# Altium PCB sdram_xsd.PcbDoc
Units mm, origin at the board's own origin, x right, y up, seen from the top; angles counter-clockwise.
Board outline 23.2 x 49.92 mm, 4 copper layers (Top Layer, Signal Layer 2, Signal Layer 1, Bottom Layer), stack 1.651 mm thick; 16 components, 39 nets, 177 pads, 109 vias.
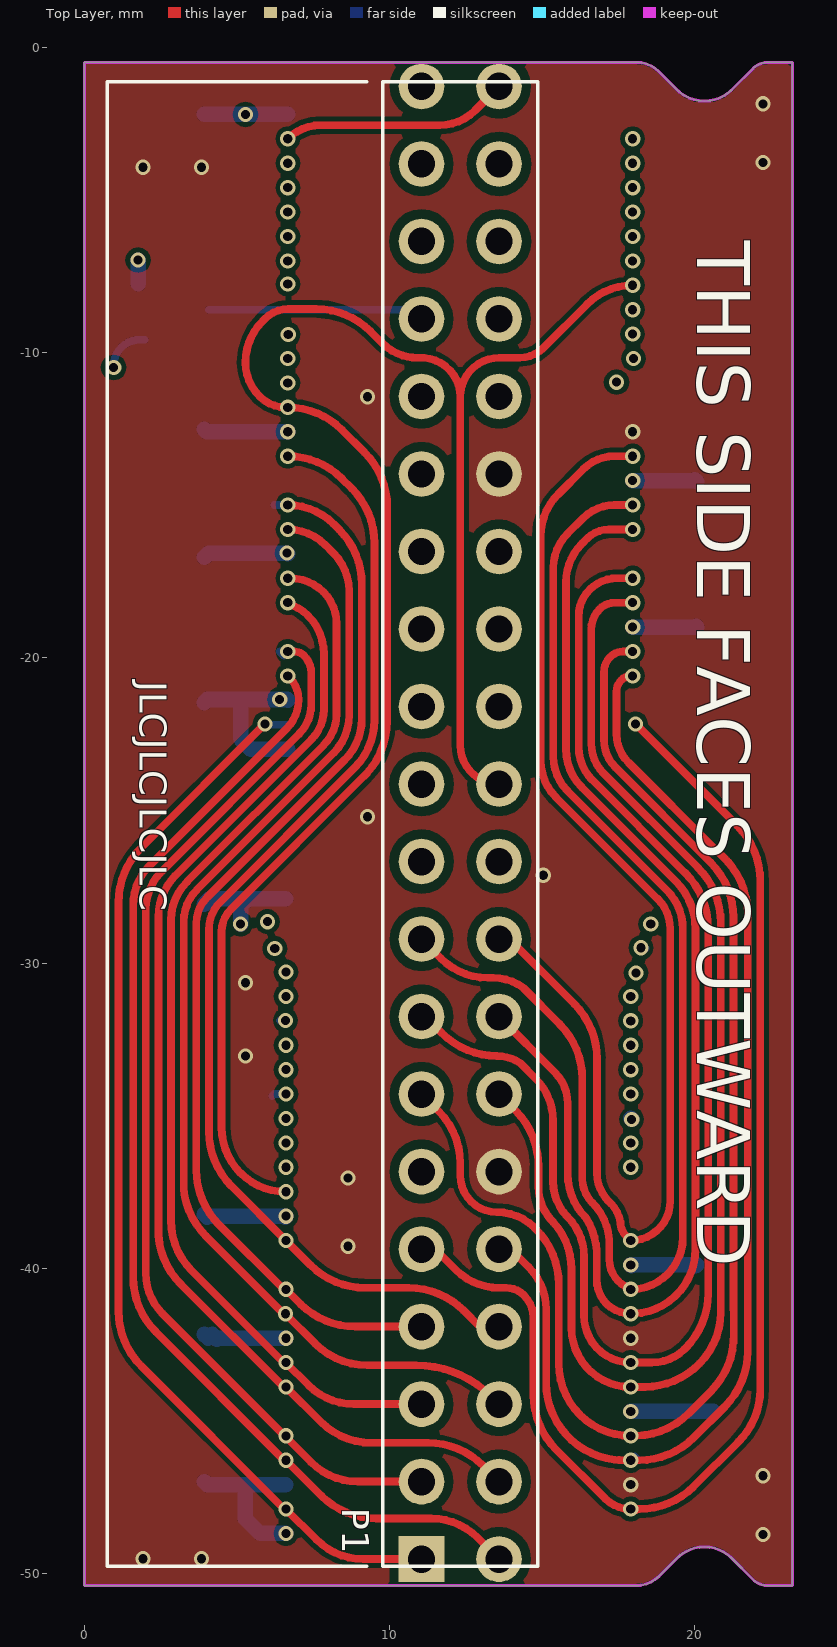
[diagram p0: Top Layer view]
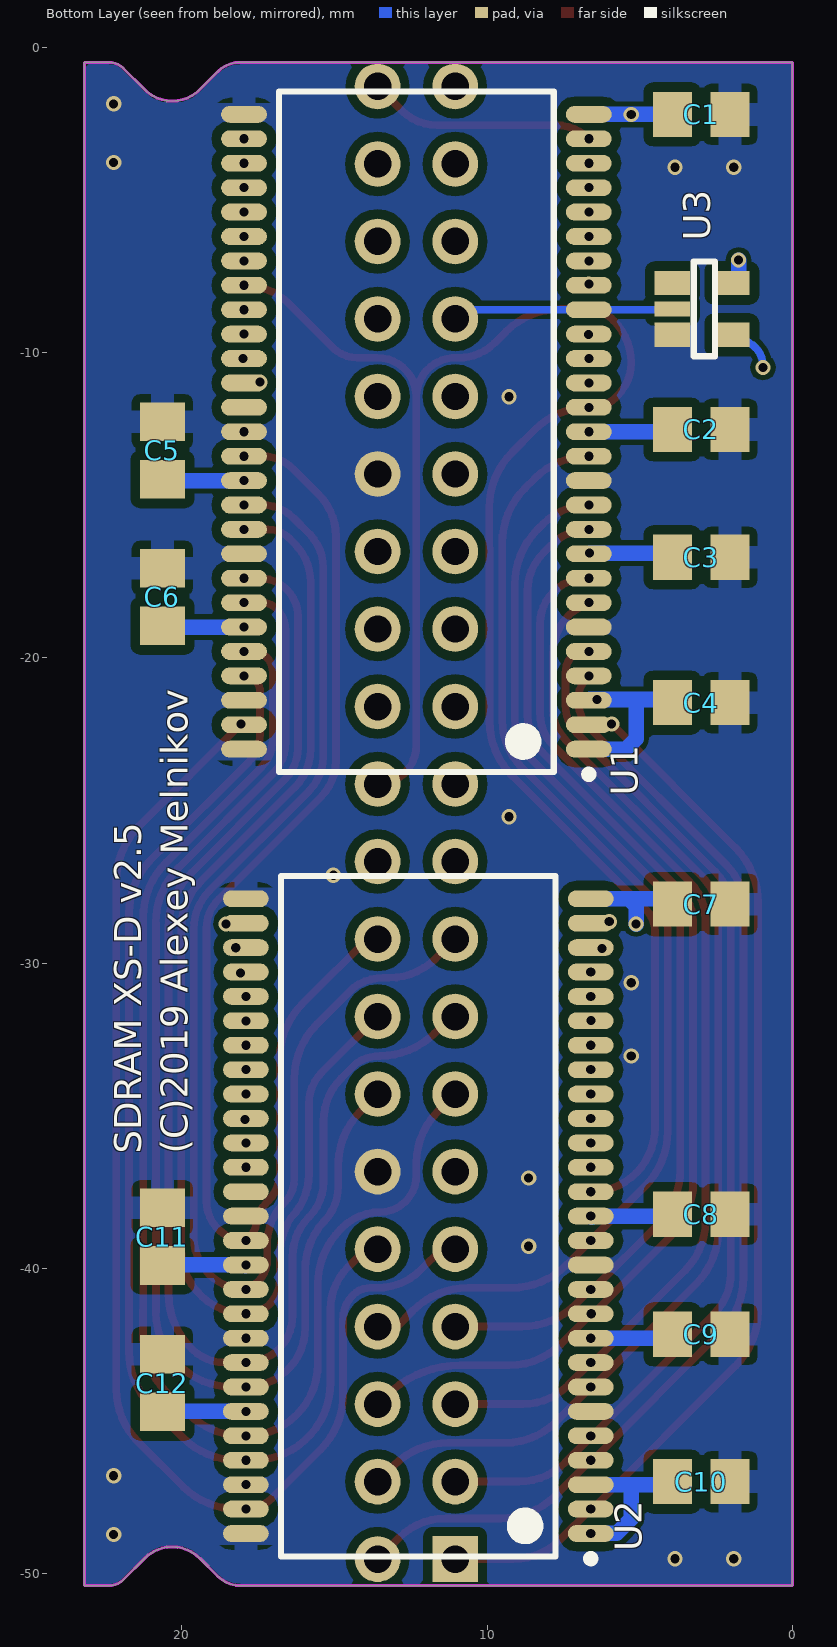
[diagram p1: Bottom Layer view, seen from below]
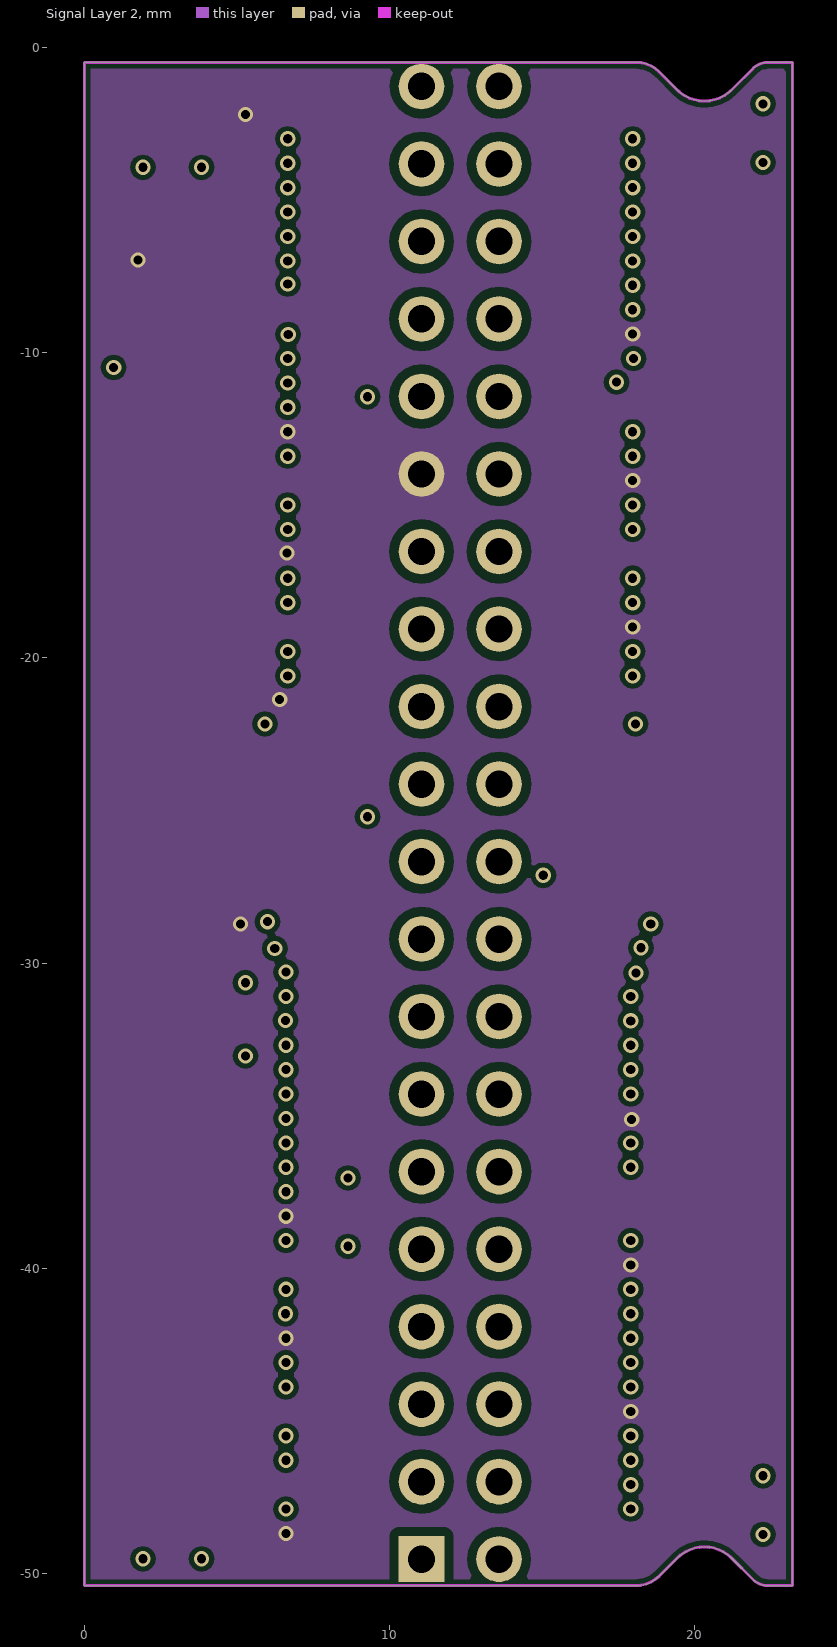
[diagram p2: Signal Layer 2]
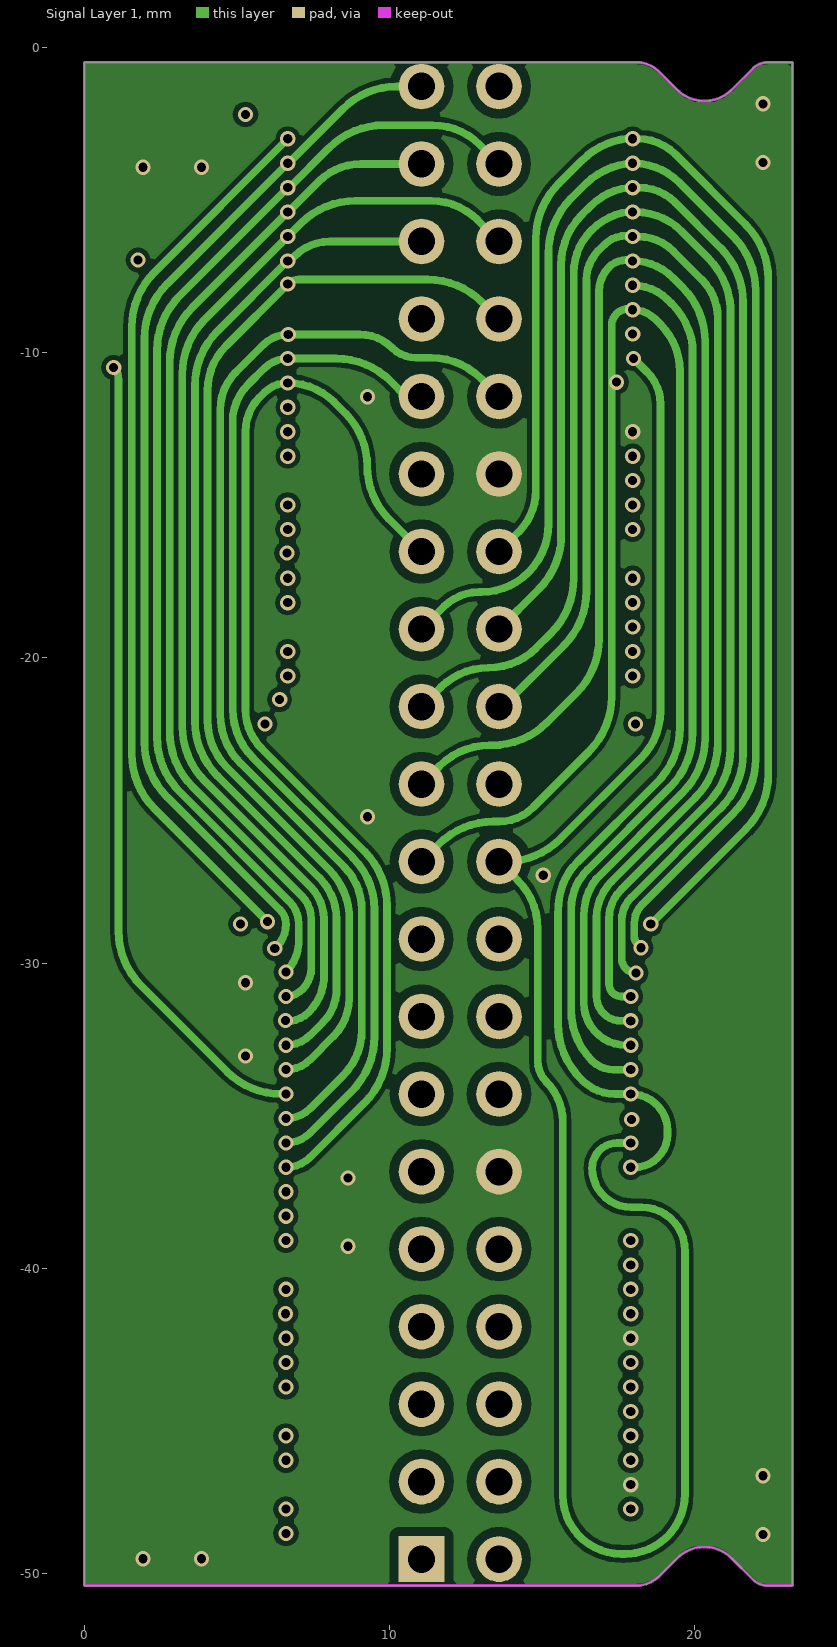
[diagram p3: Signal Layer 1]
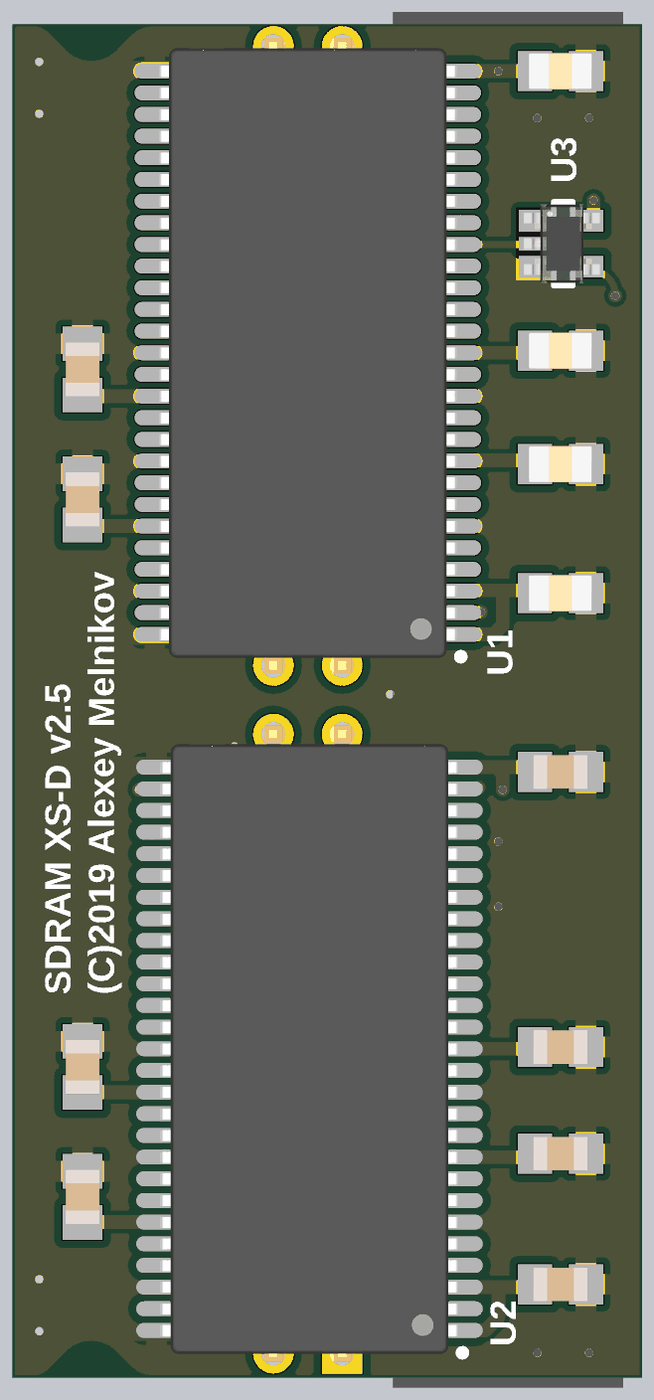
[diagram p4: 3D render of the assembled board from below, using the file's embedded part models]

## Layer stack, top to bottom
Top Solder: solder mask 0.0102, Solder Resist, Dk 3.5
Top Layer: signal copper 0.0356
Dielectric 2: core 0.254, Dk 4.2
Signal Layer 2: signal copper 0.036
Dielectric 5: prepreg 1, Dk 4.2
Signal Layer 1: signal copper 0.036
Dielectric 4: core 0.254, Dk 4.2
Bottom Layer: signal copper 0.0356
Bottom Solder: solder mask 0.0102, Solder Resist, Dk 3.5

## Board outline
0,-50.4 17.145,-50.4 18.08,-50.4 ccw(c18.08,-49.328) 18.838,-50.086 19.422,-49.502 cw(c20.32,-50.4) 20.32,-49.13 cw(c20.32,-50.4) 21.218,-49.502 21.915,-50.199 ccw(c22.4,-49.714) 22.4,-50.4 23.2,-50.4 23.2,-0.48 22.395,-0.48 ccw(c22.395,-1.158) 21.916,-0.678 21.256,-1.338 cw(c20.32,-0.48) 20.32,-1.75 cw(c20.32,-0.48) 19.384,-1.338 18.828,-0.783 ccw(c18.098,-1.514) 18.098,-0.48 17.145,-0.48 9.271,-0.48 0,-0.48

## Design rules (kind name [scope] priority, off if disabled: settings)
BoardOutlineClearance [All] p1: gap=0 ignorepadtopadclearanceinfootprint=FALSE
Clearance keep-out_clearance [InNamedPolygon('ground') vs OnLayer('Keep-Out Layer')] p1: gap=0 ignorepadtopadclearanceinfootprint=FALSE
Clearance keep-out_clearance_1 [IsBoardCutoutRegion vs InNamedPolygon('ground')] p2: gap=0 ignorepadtopadclearanceinfootprint=FALSE
Clearance [All] p3: gap=0.16 ignorepadtopadclearanceinfootprint=TRUE except(0: Arc-Hole Track-Hole SMDPad-Hole THPad-Hole Via-Hole Fill-Hole Poly-Hole Region-Hole Text-Hole; 0.3: SMDPad-Fill SMDPad-Poly SMDPad-Region THPad-Fill THPad-Poly THPad-Region)
ComponentClearance [All] p1 off: gap=0.254 collisioncheckmode=3 verticalgap=0.254 showdistances=FALSE
Height [All] p1 off: minheight=0 maxheight=25.4 prefheight=12.7
HoleSize [All] p1: absolutevalues=TRUE maxlimit=6 minlimit=0.025 maxpercent=80.000 minpercent=20.000
HoleToHoleClearance [All] p1: gap=0.127 allowstackedmicrovias=TRUE
MinimumSolderMaskSliver [All] p1: minsoldermaskwidth=0.25
PolygonConnect PolygonConnect_1 [HasFootprint('C0805')] p1: connectstyle=Relief reliefconductorwidth=0.762 reliefentries=4 polygonreliefangle="90 Angle" airgapwidth=0.254
PolygonConnect PolygonConnect_2 [HasFootprint('TSOP54')] p2: connectstyle=Relief reliefconductorwidth=0.762 reliefentries=4 polygonreliefangle="90 Angle" airgapwidth=0.254
PolygonConnect [All] p3: connectstyle=Direct reliefconductorwidth=0.254 reliefentries=4 polygonreliefangle="90 Angle" airgapwidth=0.254
RoutingCorners [All] p1: cornerstyle=Round minsetback=2.54 maxsetback=2.54
RoutingVias [All] p1: holewidth=0.3 width=0.5 viastyle="Through Hole" minholewidth=0.3 minwidth=0.5 maxholewidth=0.3 maxwidth=0.5
ShortCircuit [IsBoardCutoutRegion] p1: allowed=TRUE
ShortCircuit ShortCircuit_1 [All] p2: allowed=FALSE
SilkToSolderMaskClearance [IsPad] p1 off: minsilkscreentomaskgap=0.127 clearancetoexposedcopper=TRUE
SolderMaskExpansion SolderMaskExpansion_U1 [InComponent('U1')] p1: expansion=0
SolderMaskExpansion [All] p2: expansion=0.051
Width Width_power [InNetClass('power')] p1: maxlimit=2 minlimit=0.254 preferedwidth=0.508 midlayer1_maxwidth=0.254 midlayer1_prefwidth=0.254 midlayer2_maxwidth=0.254 midlayer2_prefwidth=0.254 minimp=50.000000 maximp=50.000000 favimp=50.000000
Width Width_signal [All] p2: maxlimit=0.254 minlimit=0.254 preferedwidth=0.254
22 further rules are at their usual default settings.

## Classes and differential pairs
net class power: GND VCC

## Components (designator, comment, footprint, x,y, rotation, side; value= is the part's Value field where it differs from the comment)
C1 "C0805" C0805 2.985,-2.186 r0 bottom value=1uF
C2 "C0805" C0805 2.985,-12.51 r0 bottom value=1uF
C3 "+" C0805 2.984,-16.701 r0 bottom value=1uF
C4 "C0805" C0805 2.985,-21.463 r0 bottom value=1uF
C5 "+" C0805 20.64,-13.2 r270 bottom value=1uF
C6 "+" C0805 20.64,-18 r270 bottom value=1uF
C7 "C0805" C0805 2.985,-28.067 r0 bottom value=1uF
C8 "C0805" C0805 2.985,-38.227 r0 bottom value=1uF
C9 "+" C0805 2.985,-42.164 r0 bottom value=1uF
C10 "C0805" C0805 2.985,-46.99 r0 bottom value=1uF
C11 "C0805" C0805 20.64,-38.96 r270 bottom value=1uF
C12 "+" C0805 20.64,-43.76 r270 bottom value=1uF
P1 "Header 20X2" HDR20x2_90 11.049,-49.53 r270 top locked
U1 "AS4C32M16SB-6TIN" TSOP54#1 12.318,-12.586 r0 bottom
U2 "AS4C32M16SB-6TIN" TSOP54#2 12.256,-38.291 r0 bottom
U3 "LVC1G04" SOT23/70-5 2.88,-8.56 r180 bottom

## Footprints (in the part's own frame and the unit in brackets; to place one, negate y for a bottom-side part, rotate by r counter-clockwise, add the part's x,y. Pads: shape width x height; smd on the part's side, far side on the other; paste and mask are expansions set on the pad)
C0805 [mm] "Capacitor, Chip; 2.35 mm L X 1.35 mm W X 1.00 mm H body"
  rect 1.27x1.48 smd: 1(-0.945,0) 2(0.945,0)
  body extent -1.17,-0.67 1.17,0.67, height 1
HDR20x2_90 [mm] "Header, Right Angle Receptacle, 2.54 mm pitch; 0.65 mm lead width, 40 pins, 2 rows, 20 pins per row, 50.80 mm L X 8.50 mm W X 5.08 mm H body"
  rect 1.5x1.5 hole 0.9: 1(0,0)
  round 1.5 hole 0.9: 2(0,2.54) 3(-2.54,0) 4(-2.54,2.54) 5(-5.08,0) 6(-5.08,2.54) 7(-7.62,0) 8(-7.62,2.54) 9(-10.16,0) 10(-10.16,2.54) 11(-12.7,0) 12(-12.7,2.54) 13(-15.24,0) 14(-15.24,2.54) 15(-17.78,0) 16(-17.78,2.54) 17(-20.32,0) 18(-20.32,2.54) 19(-22.86,0) 20(-22.86,2.54) 21(-25.4,0) 22(-25.4,2.54) 23(-27.94,0) 24(-27.94,2.54) 25(-30.48,0) 26(-30.48,2.54) 27(-33.02,0) 28(-33.02,2.54) 29(-35.56,0) 30(-35.56,2.54) 31(-38.1,0) 32(-38.1,2.54) 33(-40.64,0) 34(-40.64,2.54) 35(-43.18,0) 36(-43.18,2.54) 37(-45.72,0) 38(-45.72,2.54) 39(-48.26,0) 40(-48.26,2.54)
  silkscreen extent -48.41,-10.3 0.23,3.81, body extent -49.53,-10.39 1.27,2.87, height 5.08
SOT23/70-5 [mm] "SOT23 and SOT70-5 universal footprint"
  rect 1.168x0.8 smd: 1(-1.05,0.85) 3(-1.05,-0.85) 4(0.9,-0.85) 5(0.9,0.85)
  rect 1.168x0.5 smd: 2(-1.05,0)
  silkscreen extent -0.35,-1.55 0.35,1.55, body extent -1.46,-1.45 1.36,1.45, height 1.4
TSOP54#1 [mm] "SOP, 54-Leads, Body 22.3x10.2mm, Pitch 0.8mm, IPC Medium Density"
  oval 1.5x0.55 smd: 1(-5.65,10.4) 2(-5.65,9.6) 3(-5.65,8.8) 4(-5.65,8) 5(-5.65,7.2) 6(-5.65,6.4) 7(-5.65,5.6) 8(-5.65,4.8) 9(-5.65,4) 10(-5.65,3.2) 11(-5.65,2.4) 12(-5.65,1.6) 13(-5.65,0.8) 14(-5.65,0) 15(-5.65,-0.8) 16(-5.65,-1.6) 17(-5.65,-2.4) 18(-5.65,-3.2) 19(-5.65,-4) 20(-5.65,-4.8) 21(-5.65,-5.6) 22(-5.65,-6.4) 23(-5.65,-7.2) 24(-5.65,-8) 25(-5.65,-8.8) 26(-5.65,-9.6) 27(-5.65,-10.4) 28(5.65,-10.4) 29(5.65,-9.6) 30(5.65,-8.8) 31(5.65,-8) 32(5.65,-7.2) 33(5.65,-6.4) 34(5.65,-5.6) 35(5.65,-4.8) 36(5.65,-4) 37(5.65,-3.2) 38(5.65,-2.4) 39(5.65,-1.6) 40(5.65,-0.8) 41(5.65,0) 42(5.65,0.8) 43(5.65,1.6) 44(5.65,2.4) 45(5.65,3.2) 46(5.65,4) 47(5.65,4.8) 48(5.65,5.6) 49(5.65,6.4) 50(5.65,7.2) 51(5.65,8) 52(5.65,8.8) 53(5.65,9.6) 54(5.65,10.4)
  silkscreen extent -5.77,-11.15 4.5,11.35, body extent -5.88,-11.25 5.88,11.27, height 1
TSOP54#2 [mm] "SOP, 54-Leads, Body 22.3x10.2mm, Pitch 0.8mm, IPC Medium Density"
  oval 1.5x0.55 smd mask+0: 1(-5.65,10.4) 2(-5.65,9.6) 3(-5.65,8.8) 4(-5.65,8) 5(-5.65,7.2) 6(-5.65,6.4) 7(-5.65,5.6) 8(-5.65,4.8) 9(-5.65,4) 10(-5.65,3.2) 11(-5.65,2.4) 12(-5.65,1.6) 13(-5.65,0.8) 14(-5.65,0) 15(-5.65,-0.8) 16(-5.65,-1.6) 17(-5.65,-2.4) 18(-5.65,-3.2) 19(-5.65,-4) 20(-5.65,-4.8) 21(-5.65,-5.6) 22(-5.65,-6.4) 23(-5.65,-7.2) 24(-5.65,-8) 25(-5.65,-8.8) 26(-5.65,-9.6) 27(-5.65,-10.4) 28(5.65,-10.4) 29(5.65,-9.6) 30(5.65,-8.8) 31(5.65,-8) 32(5.65,-7.2) 33(5.65,-6.4) 34(5.65,-5.6) 35(5.65,-4.8) 36(5.65,-4) 37(5.65,-3.2) 38(5.65,-2.4) 39(5.65,-1.6) 40(5.65,-0.8) 41(5.65,0) 42(5.65,0.8) 43(5.65,1.6) 44(5.65,2.4) 45(5.65,3.2) 46(5.65,4) 47(5.65,4.8) 48(5.65,5.6) 49(5.65,6.4) 50(5.65,7.2) 51(5.65,8) 52(5.65,8.8) 53(5.65,9.6) 54(5.65,10.4)
  silkscreen extent -5.77,-11.15 4.5,11.35, body extent -5.88,-11.25 5.88,11.27, height 1

## Part data
C1 C2 C4 C7 C8 C10 C11: "Ceramic Chip Capacitor - Standard", PackageDocument=Mar-2001, Code_IPC=2012[0805], Code_JEITA=0805, ComponentLink1Description="Manufacturer Link", ComponentLink1URL=http://www.kemet.com/, ComponentLink2Description=Datasheet, ComponentLink2URL=http://www.kemet.com/kemet/web/homepage/kechome.nsf/vapubfilesname/F3102TA.pdf/$file/F3102TA.pdf, DatasheetDocument=Mar-2001, LatestRevisionDate=19-Mar-2004, LatestRevisionNote="Silkscreen size reduced.", Note="Footprint corresponds to dimensions for bulk cassette packaging. This case size has tightened tolerances.", PackageReference=0805, Published=17-Jul-2002, Publisher="Altium Limited"
C3 C5 C6 C9 C12: library part C0805, "Ceramic Chip Capacitor - Standard", PackageDocument=Mar-2001, Code_IPC=2012[0805], Code_JEITA=0805, ComponentLink1Description="Manufacturer Link", ComponentLink1URL=http://www.kemet.com/, ComponentLink2Description=Datasheet, ComponentLink2URL=http://www.kemet.com/kemet/web/homepage/kechome.nsf/vapubfilesname/F3102TA.pdf/$file/F3102TA.pdf, DatasheetDocument=Mar-2001, LatestRevisionDate=19-Mar-2004, LatestRevisionNote="Silkscreen size reduced.", Note="Footprint corresponds to dimensions for bulk cassette packaging. This case size has tightened tolerances.", PackageReference=0805, Published=17-Jul-2002, Publisher="Altium Limited"
P1: "Header, 20-Pin, Dual row", LatestRevisionDate=17-Jul-2002, LatestRevisionNote="Re-released for DXP Platform.", Publisher="Altium Limited"
U1 U2: library part AS4C16M16SA-6TCN, "256Mb SDR SDRAM, 16Mb x 16, 6ns, 3.3V, 54-Pin TSOP", Manufacturer=Micron, Op. Temp.="0C to +70C", PartNumber=MT48LC16M16A2P-6A, Voltage=3.3V, CL="CL = 3", Clock Rate="167 MHz", ComponentLink1Description="Manufacturer URL", ComponentLink1URL=http://www.micron.com/, ComponentLink2Description=Datasheet, ComponentLink2URL=http://www.micron.com/~/media/Documents/Products/Data%20Sheet/DRAM/256Mb_sdr.pdf, ComponentLink3Description="Package Specification", ComponentLink3URL=http://www.micron.com/~/media/Documents/Products/Data%20Sheet/DRAM/128mb_x4x8x16_sdram.pdf, Cycle Time=6ns, Data Rate=PC133, DatasheetVersion=Rev.Q, Density=256Mb, Depth=16Mb, Mounting Technology="Surface Mount", PackageDescription="54-Pin Thin Small Outline Package, 10.16 x 22.22 mm, Pitch 0.8 mm", PackageReference=MICT-P-54, PackageVersion=Rev.Q, RoHS=Yes, Width=x16
U3: "INVERTER", Geometry.Height=1.45mm, Supplier_Name=RS

## Via types
v1: diameter 0.5, hole 0.3, Top Layer to Bottom Layer, tented both sides, 109 vias

## Nets (pads, with @x,y where several pads share a name; then routed paths per layer and width w, separated by ;. In a path a pad name is that pad's centre, name@x,y a point inside that pad or via, vN(x,y) a via of type N, cw(c..) or ccw(c..) an arc to the next point about the centre after c; other vN are vias at no path point)
A0: P1.37 U1.23 U2.23 | length 34.6
  Signal Layer 1 w0.254: v1(6.606,-31.091) 6.516,-31.091 6.487,-31.12 ccw(c6.487,-30.171) 7.158,-30.842 ccw(c6.487,-30.171) 7.436,-30.171 7.436,-28.56 ccw(c6.346,-28.56) 7.117,-27.789 3.54,-24.212 cw(c5.336,-22.416) 2.796,-22.416 2.796,-10.31 cw(c5.336,-10.31) 3.54,-8.514 v1(6.668,-5.386) 6.679,-5.386 7.68,-4.385 cw(c9.068,-5.773) 9.068,-3.81 P1.37
A1: P1.38 U1.24 U2.24 | length 37.3
  Signal Layer 1 w0.254: v1(6.606,-30.291) ccw(c5.594,-29.279) 7.022,-29.364 7.022,-28.707 ccw(c5.991,-28.707) 6.72,-27.978 3.126,-24.384 cw(c4.922,-22.588) 2.382,-22.588 2.382,-9.924 cw(c4.922,-9.924) 3.126,-8.128 v1(6.668,-4.586) 6.717,-4.586 8.019,-3.284 cw(c9.815,-5.08) 9.815,-2.54 11.412,-2.54 cw(c11.412,-4.729) 12.96,-3.181 P1.38
A2: P1.39 U1.25 U2.25 | length 34.8
  Signal Layer 1 w0.254: v1(6.24,-29.52) 6.303,-29.458 ccw(c5.565,-28.72) 6.608,-28.72 ccw(c5.959,-28.72) 6.418,-28.261 2.712,-24.555 cw(c4.508,-22.759) 1.968,-22.759 1.968,-9.538 cw(c4.508,-9.538) 2.712,-7.742 v1(6.668,-3.786) 6.691,-3.786 8.477,-2 cw(c10.24,-3.763) 10.24,-1.27 P1.39
A3: P1.40 U1.26 U2.26 | length 37
  Top Layer w0.254: v1(6.668,-2.986) cw(c7.744,-4.063) 7.744,-2.54 11.639,-2.54 ccw(c11.639,-0.898) 12.799,-2.06 ; 12.8,-2.059 P1.40
  Signal Layer 1 w0.254: v1@6.08,-28.72 v1(6,-28.64) 2.298,-24.938 cw(c4.094,-23.142) 1.554,-23.142 1.554,-9.152 cw(c4.094,-9.152) 2.298,-7.356 v1(6.668,-2.986)
A4: P1.28 U1.29 U2.29 | length 45.2
  Signal Layer 1 w0.254: P1.28 14.24,-15.859 ccw(c12.898,-14.517) 14.796,-14.517 14.796,-6.259 cw(c17.336,-6.259) 15.54,-4.463 16.309,-3.694 cw(c18.08,-5.465) 18.08,-2.96 v1@18.054,-2.986 ; v1(17.968,-2.986) v1@18.054,-2.986 ; v1(18.56,-28.72) 21.672,-25.608 ccw(c19.876,-23.812) 22.416,-23.812 22.416,-7.593 ccw(c19.876,-7.593) 21.672,-5.797 19.36,-3.485 ccw(c18.155,-4.69) 18.155,-2.986 v1@18.054,-2.986
A5: P1.25 U1.30 U2.30 | length 48.7
  Signal Layer 1 w0.254: P1.25 11.779,-18.32 cw(c12.938,-19.479) 12.938,-17.84 13.005,-17.84 ccw(c13.005,-15.655) 14.55,-17.2 ccw(c12.957,-15.607) 15.21,-15.607 15.21,-6.734 cw(c17.75,-6.734) 15.954,-4.938 16.416,-4.475 cw(c18.08,-6.139) v1@18.023,-3.787 ; v1(17.968,-3.786) cw(c17.968,-5.956) v1@18.023,-3.787 ; 18.277,-28.08 ccw(c18.892,-28.695) 18.023,-28.695 18.023,-29.143 ccw(c18.309,-29.143) v1@18.309,-29.429 ; 18.278,-28.08 21.258,-25.1 ccw(c19.462,-23.304) 22.002,-23.304 22.002,-7.973 ccw(c19.462,-7.973) 21.258,-6.177 19.502,-4.422 ; 19.501,-4.421 ccw(c17.968,-5.956) v1@18.023,-3.787
  Bottom Layer w0.254: v1(18.24,-29.498) 18.37,-29.498 18.392,-29.52 18.4,-29.513 U2.30@18.352,-29.464
A6: P1.26 U1.31 U2.31 | length 45.9
  Signal Layer 1 w0.254: P1.26 14.888,-17.751 ccw(c13.092,-15.955) 15.624,-16.158 15.624,-7.12 cw(c17.95,-7.12) 16.305,-5.475 16.592,-5.188 cw(c18.08,-6.676) 18.08,-4.572 v1@18.066,-4.586 ; v1(17.968,-4.586) v1@18.066,-4.586 ; v1(18.08,-30.32) cw(c18.08,-29.849) 17.609,-29.849 17.609,-28.603 cw(c18.671,-28.603) 17.919,-27.853 20.844,-24.929 ccw(c19.048,-23.133) 21.588,-23.133 21.588,-8.352 ccw(c19.048,-8.352) 20.844,-6.556 19.36,-5.073 ccw(c18.186,-6.247) 18.186,-4.586 v1@18.066,-4.586
A7: P1.23 U1.32 U2.32 | length 49.7
  Signal Layer 1 w0.254: P1.23 11.668,-20.971 ; 11.668,-20.971 cw(c13.24,-22.543) 13.24,-20.32 ccw(c13.24,-18.097) 14.811,-19.669 ; 14.812,-19.669 15.294,-19.186 ccw(c13.498,-17.39) 16.038,-17.39 16.038,-7.371 cw(c17.977,-7.371) 16.606,-6 16.656,-5.95 cw(c18.08,-7.374) 18.08,-5.36 v1@18.054,-5.386 ; v1(17.906,-31.091) 17.595,-31.091 cw(c17.595,-30.69) 17.195,-30.69 17.195,-28.545 cw(c18.532,-28.545) 17.587,-27.6 20.43,-24.757 ccw(c18.634,-22.961) 21.174,-22.961 21.174,-8.479 ccw(c18.642,-8.682) 20.438,-6.886 19.551,-6 ccw(c18.069,-7.482) 18.069,-5.386 v1@18.054,-5.386 ; v1(17.968,-5.386) v1@18.054,-5.386
A8: P1.24 U1.33 U2.33 | length 46.9
  Signal Layer 1 w0.254: P1.24 13.716,-21.59 15.708,-19.598 ccw(c13.912,-17.802) 16.452,-17.802 16.452,-7.613 cw(c17.828,-7.613) 16.855,-6.64 17.034,-6.461 cw(c17.76,-7.186) 17.76,-6.16 17.786,-6.186 v1(17.968,-6.186) 18.143,-6.186 cw(c18.143,-7.827) 19.303,-6.667 20.237,-7.6 ; v1(17.906,-31.891) 17.59,-31.891 cw(c17.59,-31.081) 16.781,-31.081 16.781,-28.526 cw(c18.485,-28.526) 17.28,-27.321 20.016,-24.586 ccw(c18.22,-22.79) 20.76,-22.79 20.76,-8.863 ccw(c18.974,-8.863) 20.237,-7.6
A9: P1.21 U1.34 U2.34 | length 50.3
  Signal Layer 1 w0.254: P1.21 11.639,-23.54 cw(c13.28,-25.18) 13.28,-22.86 13.362,-22.86 ccw(c13.362,-20.32) 15.158,-22.116 16.122,-21.152 ccw(c14.326,-19.356) 16.866,-19.356 16.866,-7.979 cw(c17.979,-7.979) 17.192,-7.192 cw(c17.752,-7.752) v1@17.752,-6.96 ; v1(17.906,-32.691) 17.76,-32.691 cw(c17.76,-31.298) 16.367,-31.298 16.367,-28.443 cw(c18.348,-28.443) 16.77,-27.245 19.602,-24.414 ccw(c17.806,-22.618) 20.346,-22.618 20.346,-9.65 ccw(c17.806,-9.65) 19.602,-7.854 19.275,-7.528 ccw(c17.968,-8.835) v1(17.968,-6.986)
A10: P1.36 U1.22 U2.22 | length 37.5
  Signal Layer 1 w0.254: v1(6.592,-31.877) 6.592,-31.915 6.587,-31.92 ccw(c6.587,-30.827) 7.359,-31.601 ; 7.361,-31.599 ccw(c6.157,-30.397) 7.85,-30.563 7.85,-28.56 ccw(c6.346,-28.56) 7.41,-27.497 3.954,-24.041 cw(c5.75,-22.245) 3.21,-22.245 3.21,-10.696 cw(c5.75,-10.696) 3.954,-8.9 v1(6.668,-6.186) 7.093,-5.76 cw(c8.889,-7.557) 8.889,-5.017 11.36,-5.017 cw(c11.36,-7.178) 12.888,-5.649 ; 12.889,-5.65 P1.36
  Bottom Layer w0.254: U2.22@6.414,-31.877 v1(6.592,-31.877) U2.22
A11: P1.22 U1.15 U1.35 U2.15 U2.35 | length 92.5
  Top Layer w0.254: 5.121,-36.881 ccw(c6.594,-35.406) 6.594,-37.491 v1(6.606,-37.491) ; 5.12,-36.88 cw(c6.622,-35.378) 4.498,-35.378 4.498,-28.969 cw(c5.529,-28.969) 4.8,-28.24 9.176,-23.864 ccw(c7.38,-22.068) 9.261,-23.775 ccw(c7.38,-22.068) 9.92,-22.068 9.92,-16.392 ; 9.928,-16.392 9.928,-15.06 ccw(c7.388,-15.06) 9.184,-13.264 8.44,-12.52 ccw(c6.668,-14.293) v1(6.668,-11.786) 6.595,-11.786 cw(c6.595,-10.605) 5.76,-11.44 5.733,-11.413 cw(c6.825,-10.32) 5.28,-10.32 cw(c7.211,-10.32) 5.846,-8.954 5.92,-8.88 cw(c6.693,-9.653) 6.693,-8.56 7.588,-8.56 cw(c7.588,-11.1) 9.384,-9.304 9.76,-9.68 ccw(c10.919,-8.521) 10.424,-10.084 ccw(c10.919,-8.521) 10.919,-10.16 11.04,-10.16 cw(c11.04,-11.44) 11.132,-10.163 cw(c11.04,-11.44) 12.32,-11.44 ; P1.22 cw(c13.589,-22.861) 12.32,-22.861 12.32,-11.44 ; v1(17.968,-7.786) ccw(c17.968,-9.895) 16.476,-8.404 15.04,-9.84 cw(c14.267,-9.067) 14.267,-10.16 13.6,-10.16 ccw(c13.6,-11.44) 12.32,-11.44
  Signal Layer 1 w0.254: v1(17.906,-33.491) 17.341,-33.491 cw(c17.341,-32.499) 16.64,-33.2 cw(c18.299,-31.541) 15.953,-31.541 15.953,-28.222 cw(c17.752,-28.222) 16.48,-26.95 19.188,-24.243 ccw(c17.392,-22.447) 19.932,-22.447 19.932,-9.754 ccw(c17.58,-10.079) 19.259,-8.4 19.123,-8.265 ; v1(17.968,-7.786) cw(c17.968,-9.42) 19.123,-8.264
  Bottom Layer w0.254: P1.22@13.462,-24.13 P1.22
A12: P1.19 U1.36 U1.39 U2.36 U2.39 | length 55.3
  Signal Layer 1 w0.254: P1.19 11.615,-26.104 cw(c13.411,-27.9) 13.411,-25.36 13.586,-25.36 ccw(c13.586,-23.78) 14.703,-24.897 16.536,-23.064 ccw(c14.74,-21.268) 17.28,-21.268 17.28,-9.106 cw(c17.826,-9.106) 17.44,-8.72 ; 15.547,-28.039 ccw(c18.065,-28.372) 15.542,-28.08 ; 17.44,-8.72 cw(c17.826,-9.106) 17.826,-8.56 17.852,-8.586 v1(17.968,-8.586) cw(c17.968,-9.63) 18.706,-8.892 18.881,-9.067 cw(c17.341,-10.605) 19.518,-10.605 19.518,-22.275 cw(c16.978,-22.275) 18.774,-24.071 16.16,-26.685 ccw(c17.659,-28.184) 15.542,-28.08 ; v1(17.906,-36.691) 18.023,-36.691 ccw(c18.023,-35.6) 19.114,-35.6 19.114,-35.497 ccw(c17.907,-35.497) 18.566,-34.486 ccw(c17.907,-35.497) v1(17.907,-34.29) 17.406,-34.29 cw(c17.406,-32.754) 16.32,-33.84 16.269,-33.789 cw(c18.065,-31.993) 15.525,-31.993 15.525,-28.372 cw(c18.065,-28.372) 15.542,-28.08
  Bottom Layer w0.254: v1(17.907,-34.29) U2.36@17.937,-34.32
  other v1: 17.44,-10.96
BA0: P1.34 U1.20 U2.20 | length 36.9
  Signal Layer 1 w0.254: v1(6.606,-33.491) ccw(c6.606,-32.37) 7.398,-33.162 8.16,-32.4 ccw(c6.909,-31.149) 8.678,-31.149 8.678,-28.366 ccw(c6.373,-28.56) 8.009,-26.925 ; 8.009,-26.925 4.684,-23.6 cw(c6.244,-22.04) 4.038,-22.04 4.038,-11.228 cw(c6.093,-11.228) 4.64,-9.775 v1(6.668,-7.747) cw(c7.022,-8.102) 7.022,-7.6 11.247,-7.6 cw(c11.247,-10.14) 13.043,-8.344 P1.34
BA1: P1.35 U1.21 U2.21 | length 34
  Signal Layer 1 w0.254: v1(6.606,-32.691) ccw(c6.606,-31.57) 7.397,-32.363 ; 6.88,-6.836 6.73,-6.986 v1(6.668,-6.986) 4.368,-9.286 ccw(c6.164,-11.082) 3.624,-11.082 3.624,-22.073 ccw(c6.164,-22.073) 4.368,-23.869 7.702,-27.203 ; 6.881,-6.835 cw(c8.053,-8.009) 8.053,-6.35 P1.35 ; 7.398,-32.362 7.812,-31.948 ; 7.703,-27.204 cw(c6.346,-28.56) 8.264,-28.56 8.264,-30.997 cw(c6.701,-30.837) 7.812,-31.948
CAS: P1.31 U1.17 U2.17 | length 34.4
  Signal Layer 1 w0.254: 4.866,-21.68 ccw(c7.113,-21.68) 5.524,-23.269 8.807,-26.552 ; 4.866,-21.68 4.866,-12.052 cw(c6.662,-12.302) 5.379,-11.021 ; 5.38,-11.02 5.893,-10.507 ; 5.894,-10.506 cw(c6.668,-11.281) v1(6.668,-10.186) 8.245,-10.186 cw(c8.245,-12.726) 10.041,-10.93 10.541,-11.43 P1.31 ; v1(6.606,-35.891) ccw(c6.606,-34.77) 7.398,-35.562 8.762,-34.198 ccw(c6.966,-32.402) 9.506,-32.402 9.506,-28.24 ccw(c7.118,-28.24) 8.807,-26.552
CLK: P1.20 U1.38 U2.38 | length 61.5
  Signal Layer 1 w0.254: 14.199,-27.28 P1.20 13.798,-26.67 ccw(c13.798,-24.13) 15.594,-25.926 18.24,-23.28 ccw(c16.695,-21.735) 18.88,-21.735 18.88,-11.67 ccw(c17.431,-11.67) 18.456,-10.645 v1(17.997,-10.186) ; 14.2,-27.281 cw(c12.606,-28.873) 14.859,-28.873 14.859,-33.216 ccw(c15.801,-33.216) 15.135,-33.882 cw(c13.819,-35.198) 15.68,-35.198 15.68,-47.44 ccw(c17.6,-47.44) 17.6,-49.36 17.721,-49.36 ccw(c17.721,-47.401) 18.065,-49.33 ccw(c17.721,-47.401) 19.68,-47.401 19.68,-39.413 ccw(c18.267,-39.413) 18.267,-38 17.92,-38 cw(c17.92,-36.72) 16.64,-36.72 cw(c17.47,-36.72) 17.47,-35.891 v1(17.906,-35.891)
  Bottom Layer w0.254: U1.38 v1(17.997,-10.186)
CS1: P1.33 U1.19 U3.2 | length 7.1
  Bottom Layer w0.254: U3.2@4.083,-8.586 U1.19 10.745,-8.586 P1.33
CS2: U2.19 U3.4 | length 28.6
  Signal Layer 1 w0.254: v1(0.96,-10.48) cw(c0.574,-10.866) 1.12,-10.866 1.12,-28.948 ccw(c3.66,-28.948) 1.864,-30.744 4.667,-33.547 ccw(c6.463,-31.751) 6.463,-34.291 v1(6.606,-34.291)
  Bottom Layer w0.254: v1@0.96,-10.43 cw(c1.82,-10.43) 1.82,-9.57 U3.4@1.98,-9.57 ; U2.19@6.16,-34.354 6.222,-34.291 v1(6.606,-34.291)
DQ0: P1.1 U1.2 U2.2 | length 35.6
  Top Layer w0.254: v1(5.92,-22.16) 1.864,-26.216 ccw(c3.66,-28.012) 1.12,-28.012 1.12,-41.406 ccw(c3.66,-41.406) 1.864,-43.202 6.552,-47.891 v1(6.606,-47.891) 7.611,-48.896 ccw(c9.141,-47.367) 9.141,-49.53 P1.1
  Bottom Layer w0.254: v1(5.92,-22.16) 5.946,-22.186 U1.2
DQ1: P1.2 U1.4 U2.4 | length 38.1
  Top Layer w0.254: v1(6.668,-20.586) 6.725,-20.644 cw(c6.009,-21.36) 7.022,-21.36 cw(c5.671,-21.36) 6.626,-22.315 2.142,-26.8 ccw(c3.449,-28.108) 1.6,-28.108 1.6,-40.289 ccw(c4.14,-40.289) 2.344,-42.085 6.56,-46.302 6.571,-46.291 v1(6.606,-46.291) 7.768,-47.453 ccw(c9.564,-45.657) 9.564,-48.197 11.36,-48.197 cw(c11.36,-50.358) 12.888,-48.829 ; 12.889,-48.83 P1.2
  Bottom Layer w0.254: U1.4@6.642,-20.56 v1(6.668,-20.586)
DQ2: P1.3 U1.5 U2.5 | length 35.8
  Top Layer w0.254: v1(6.606,-45.491) v1@6.565,-45.491 ; v1(6.668,-19.786) 6.876,-19.786 cw(c6.876,-20.244) 7.2,-19.92 cw(c6.63,-20.49) 7.436,-20.49 7.436,-21.531 cw(c6.084,-21.531) 7.041,-22.486 ; 7.04,-22.487 2.528,-26.999 ccw(c3.769,-28.24) 2.014,-28.24 2.014,-40.167 ccw(c3.878,-40.167) 2.56,-41.486 v1@6.56,-45.486 ; 7.431,-46.357 v1@6.565,-45.491 ; 7.432,-46.357 ccw(c8.96,-44.828) 8.96,-46.99 P1.3 ; v1@6.56,-45.486 v1@6.565,-45.491 ; v1@6.56,-45.486 v1@6.565,-45.491
  Bottom Layer w0.254: U1.5@6.399,-19.786 6.533,-19.92 v1(6.668,-19.786) U1.5@6.399,-19.786
DQ3: P1.4 U1.7 U2.7 | length 38
  Top Layer w0.254: v1@6.659,-18.218 cw(c6.24,-19.705) 7.332,-18.612 ; 7.333,-18.613 cw(c6.083,-19.862) 7.85,-19.862 7.85,-21.68 cw(c6.444,-21.68) 7.439,-22.674 2.993,-27.12 ccw(c4.356,-28.483) 2.428,-28.483 2.428,-38.931 ccw(c4.96,-38.728) 3.164,-40.524 6.53,-43.891 v1(6.606,-43.891) 7.744,-45.029 ccw(c9.412,-43.361) 9.412,-45.72 11.267,-45.72 cw(c11.267,-48.26) 13.063,-46.464 P1.4
  other v1: 6.668,-18.186
DQ4: P1.5 U1.8 U2.8 | length 35.2
  Top Layer w0.254: v1(6.668,-17.386) 6.744,-17.386 cw(c6.744,-18.936) 7.84,-17.84 cw(c6.816,-18.864) 8.264,-18.864 8.264,-21.84 cw(c6.83,-21.84) 7.844,-22.854 3.36,-27.338 ccw(c4.611,-28.589) 2.842,-28.589 2.842,-38.443 ccw(c5.157,-38.443) 3.52,-40.08 6.53,-43.091 v1(6.606,-43.091) 7.353,-43.838 ccw(c8.83,-42.361) 8.83,-44.45 P1.5
DQ5: P1.6 U1.10 U2.10 | length 37.9
  Top Layer w0.254: v1(6.668,-15.786) cw(c6.668,-17.521) 7.894,-16.294 8.16,-16.56 cw(c6.909,-17.811) 8.678,-17.811 8.678,-21.873 cw(c6.909,-21.873) 8.16,-23.124 3.684,-27.6 ccw(c4.716,-28.632) 3.256,-28.632 3.256,-37.419 ccw(c5.782,-37.15) 3.986,-38.946 6.56,-41.52 v1(6.589,-41.491) 7.577,-42.478 ccw(c9.272,-40.782) 9.272,-43.18 10.88,-43.18 cw(c10.88,-46.64) P1.6@13.327,-44.193
DQ6: P1.7 U1.11 U2.11 | length 35.6
  Top Layer w0.254: v1(6.668,-14.986) cw(c6.668,-17.107) 8.167,-15.607 8.348,-15.788 cw(c6.552,-17.584) 8.367,-15.808 cw(c6.552,-17.584) 9.092,-17.584 9.092,-22 cw(c7.216,-22) 8.543,-23.326 ; 8.543,-23.326 4.021,-27.849 ccw(c4.867,-28.695) 3.67,-28.695 3.67,-36.778 ccw(c6.21,-36.778) 4.414,-38.574 6.531,-40.691 v1(6.606,-40.691) 7.081,-41.166 ccw(c8.877,-39.37) 8.877,-41.91 P1.7
  Bottom Layer w0.254: U1.11@6.223,-14.986 v1(6.668,-14.986)
DQ7: P1.8 U1.13 U2.13 | length 38.2
  Top Layer w0.254: v1(6.668,-13.386) cw(c6.668,-15.893) 8.44,-14.12 8.762,-14.442 cw(c6.966,-16.238) 9.506,-16.238 9.506,-22.027 cw(c7.282,-22.027) 8.855,-23.6 4.352,-28.103 ccw(c5.406,-28.9) 4.084,-28.9 4.084,-35.517 ccw(c6.624,-35.517) 4.828,-37.313 v1(6.606,-39.091) 7.411,-39.896 ccw(c9.207,-38.1) 9.207,-40.64 10.632,-40.64 cw(c10.632,-43.18) 12.428,-41.384 12.954,-41.91 P1.8
DQ8: P1.18 U1.42 U2.42 | length 41.5
  Top Layer w0.254: P1.18 cw(c13.589,-29.261) P1.18@13.625,-29.225 ; P1.18@13.785,-29.065 16.056,-31.336 cw(c14.26,-33.132) 16.8,-33.132 16.8,-36.885 ccw(c18.093,-36.885) 17.179,-37.799 17.254,-37.874 cw(c16.459,-38.669) 17.568,-38.485 ; 15.454,-24.56 18.794,-27.901 ; 15.453,-24.56 cw(c16.655,-23.359) 14.956,-23.359 14.956,-16.002 cw(c16.882,-16.002) 15.519,-14.641 ; v1(17.968,-13.386) 17.377,-13.386 ccw(c17.377,-14.842) 16.35,-13.81 ccw(c17.377,-14.842) 16.348,-13.812 15.52,-14.64 ; 18.795,-27.902 cw(c17.815,-28.88) 19.2,-28.88 19.2,-37.796 cw(c17.906,-37.796) v1(17.906,-39.091) 17.757,-38.942 cw(c18.213,-38.485) 17.745,-38.929 cw(c18.213,-38.485) 17.582,-38.619 ; 15.52,-14.64 ccw(c16.882,-16.002) 15.519,-14.641 ; 17.568,-38.485 ccw(c18.213,-38.485) 17.582,-38.619 ; 17.568,-38.485 cw(c16.459,-38.669) 17.582,-38.619
DQ9: P1.17 U1.44 U2.44 | length 44.9
  Top Layer w0.254: P1.17 11.684,-29.845 ccw(c13.217,-28.312) 11.685,-29.846 ccw(c13.217,-28.312) 13.217,-30.48 13.401,-30.48 cw(c13.401,-32.119) 14.391,-30.812 15.576,-31.998 cw(c13.78,-33.794) 16.32,-33.794 16.32,-37.067 ccw(c17.413,-37.067) 16.64,-37.84 cw(c15.264,-39.216) 17.204,-39.064 17.204,-39.709 ccw(c18.215,-39.709) 17.5,-40.423 ; 15.84,-24.361 19.087,-27.608 cw(c17.815,-28.88) 19.614,-28.88 19.614,-38.982 cw(c17.906,-38.982) v1@17.968,-40.689 ; 15.839,-24.36 cw(c16.975,-23.226) 15.37,-23.226 15.37,-17.04 cw(c16.939,-17.04) 15.829,-15.931 16.347,-15.413 cw(c17.377,-16.441) 16.354,-15.406 cw(c17.377,-16.441) 17.377,-14.986 v1(17.968,-14.986) ; 17.501,-40.424 ccw(c18.215,-39.709) v1@17.968,-40.689 ; v1(17.906,-40.691) ccw(c17.906,-38.982) v1@17.968,-40.689
DQ10: P1.16 U1.45 U2.45 | length 41.4
  Top Layer w0.254: P1.16 15.416,-33.577 cw(c14.393,-34.601) 15.84,-34.601 15.84,-36.91 ccw(c17.875,-36.91) 16.152,-37.992 ccw(c17.875,-36.91) 16.436,-38.348 cw(c14.542,-39.567) 16.79,-39.431 16.79,-40.375 ccw(c17.906,-40.375) v1(17.906,-41.491) ; 16.304,-24.239 cw(c17.561,-22.984) 15.784,-22.984 15.784,-17.52 cw(c17.58,-17.52) 16.31,-16.25 ; 16.304,-24.24 19.38,-27.316 cw(c17.815,-28.88) 20.028,-28.88 20.028,-39.368 cw(c17.906,-39.368) v1@18.008,-41.488 ; 16.31,-16.25 16.48,-16.08 ; 16.48,-16.08 cw(c17.189,-16.789) 16.484,-16.076 cw(c17.189,-16.789) 17.189,-15.786 v1(17.968,-15.786)
DQ11: P1.15 U1.47 U2.47 | length 45.2
  Top Layer w0.254: P1.15 11.176,-31.75 11.722,-32.296 ccw(c13.518,-30.5) 13.518,-33.04 cw(c13.518,-34.397) 14.293,-33.283 14.776,-33.766 cw(c13.366,-35.176) 15.36,-35.176 15.36,-37.161 ccw(c16.999,-37.161) 15.84,-38.32 cw(c14.546,-39.614) 16.376,-39.614 16.376,-41.561 ccw(c17.906,-41.561) 16.462,-42.068 ccw(c17.906,-41.561) v1(17.906,-43.091) ; 16.564,-17.756 ccw(c17.449,-18.64) 16.198,-18.64 16.198,-22.923 ccw(c17.707,-22.923) 16.639,-23.989 ; 16.565,-17.755 cw(c17.457,-18.648) 17.457,-17.386 v1(17.968,-17.386) ; 16.64,-23.99 19.698,-27.048 cw(c17.902,-28.844) 20.442,-28.844 20.442,-40.826 cw(c17.902,-40.826) 19.698,-42.622 19.68,-42.64 ; v1@17.915,-43.091 18.594,-43.091 ccw(c18.594,-41.555) 19.655,-42.664 ccw(c18.594,-41.555) 19.678,-42.642 ccw(c18.594,-41.555) 19.679,-42.641
DQ12: P1.14 U1.48 U2.48 | length 41.6
  Top Layer w0.254: P1.14 14.136,-34.837 cw(c12.34,-36.633) 14.851,-36.249 cw(c12.34,-36.633) 14.88,-36.633 14.88,-37.321 ccw(c16.519,-37.321) 15.288,-38.403 ; 17.02,-23.784 20.112,-26.877 cw(c18.316,-28.673) 20.856,-28.673 20.856,-41.44 cw(c18.48,-41.44) 20.16,-43.12 20.133,-43.147 cw(c18.337,-41.351) 18.37,-43.89 cw(c18.337,-41.351) 18.337,-43.891 v1@18.057,-43.891 ; 17.019,-23.784 cw(c18.004,-22.8) 16.612,-22.8 16.612,-19.066 cw(c17.574,-19.066) 16.894,-18.386 cw(c17.377,-18.87) 17.377,-18.186 v1(17.968,-18.186) ; v1(17.906,-43.891) cw(c17.906,-41.947) 15.962,-41.947 15.962,-40.031 ccw(c13.66,-40.031) 15.375,-38.495 ; 15.288,-38.403 cw(c13.66,-40.031) 15.375,-38.495 ; 15.288,-38.403 ccw(c16.519,-37.321) 15.36,-38.48 cw(c13.907,-39.933) 15.375,-38.495
  Bottom Layer w0.254: v1(17.968,-18.186) U1.48@17.993,-18.16
DQ13: P1.13 U1.50 U2.50 | length 44.4
  Top Layer w0.254: P1.13 11.614,-34.855 cw(c9.908,-36.56) 12.32,-36.56 12.32,-36.96 ccw(c13.52,-36.96) 13.52,-38.16 cw(c13.52,-39.898) 14.748,-38.668 14.804,-38.724 cw(c13.008,-40.52) 15.548,-40.52 15.548,-43.133 ccw(c17.906,-43.133) v1(17.906,-45.491) ; 17.233,-19.967 ccw(c17.733,-20.467) 17.026,-20.467 17.026,-22.664 ccw(c18.332,-22.664) 17.4,-23.579 ccw(c18.332,-22.664) 17.408,-23.587 20.526,-26.705 cw(c18.73,-28.501) 21.27,-28.501 21.27,-41.36 ; 17.234,-19.967 cw(c17.669,-20.402) 17.237,-19.963 cw(c17.669,-20.402) 17.669,-19.786 v1(17.968,-19.786) ; v1@18.094,-45.489 ccw(c18.017,-42.951) 19.813,-44.747 20.534,-44.026 ccw(c18.738,-42.23) 21.27,-42.433 ccw(c18.738,-42.23) 21.278,-42.23 21.278,-41.36
DQ14: P1.10 U1.51 U2.51 | length 39.8
  Top Layer w0.254: P1.10 13.97,-39.37 14.56,-39.96 cw(c13.174,-41.346) 15.134,-41.346 15.134,-43.751 ccw(c17.674,-43.751) 17.374,-46.273 ccw(c17.674,-43.751) 17.674,-46.291 v1(17.906,-46.291) 18.177,-46.291 ccw(c18.177,-43.751) 19.973,-45.547 20.993,-44.527 ccw(c19.197,-42.731) 21.737,-42.731 21.737,-28.377 ccw(c19.197,-28.377) 21.083,-26.677 ccw(c19.197,-28.377) 20.993,-26.581 20.726,-26.315 ; v1(17.968,-20.586) 17.924,-20.586 ccw(c17.924,-21.044) 17.6,-20.72 ccw(c17.986,-21.106) 17.44,-21.106 17.44,-22.48 ccw(c18.777,-22.48) 17.831,-23.425 20.724,-26.318
  Bottom Layer w0.254: v1(17.906,-46.291) 18.166,-46.291 18.036,-46.16 v1(17.906,-46.291)
DQ15: P1.9 U1.53 U2.53 | length 42.4
  Top Layer w0.254: P1.9 11.494,-39.37 12.172,-40.049 ccw(c13.6,-38.621) 13.6,-40.64 13.821,-40.64 cw(c13.821,-41.459) 14.4,-40.88 ; 14.401,-40.88 cw(c13.629,-41.651) 14.72,-41.651 14.72,-44.148 ccw(c17.26,-44.148) 15.464,-45.944 17.06,-47.54 ccw(c17.906,-46.695) v1@17.702,-47.873 ; v1(17.906,-47.891) cw(c17.906,-46.695) v1@17.702,-47.873 ; v1(18.061,-22.16) 21.407,-25.505 cw(c19.611,-27.301) 22.151,-27.301 22.151,-43.964 cw(c19.724,-43.964) 21.441,-45.679 cw(c19.724,-43.964) 21.44,-45.68 19.973,-47.147 cw(c18.177,-45.351) 18.177,-47.891 18.05,-47.891 18.08,-47.92 cw(c18.08,-46.375) v1@17.702,-47.873
  Bottom Layer w0.254: v1(17.906,-47.891) U2.53@17.935,-47.92
GND: C1.1 C2.1 C3.1 C4.1 C5.1 C6.1 C7.1 C8.1 C9.1 C10.1 C11.1 C12.1 P1.12 P1.30 U1.6 U1.12 U1.28 U1.41 U1.46 U1.52 U1.54 U2.6 U2.12 U2.28 U2.41 U2.46 U2.52 U2.54 U3.3
  other v1: 1.92,-49.52 3.84,-49.52 22.24,-48.72 17.906,-47.091 22.24,-46.8 17.906,-42.291 8.64,-39.28 8.64,-37.04 5.28,-33.04 5.28,-30.64 15.04,-27.12 9.28,-25.2 17.968,-12.586 9.28,-11.44 1.92,-3.92 3.84,-3.92 22.24,-3.76 22.24,-1.84
RAS: P1.32 U1.18 U2.18 | length 37.3
  Signal Layer 1 w0.254: v1(6.606,-35.091) ccw(c6.606,-33.97) 7.398,-34.762 8.48,-33.68 ; 8.48,-33.68 ccw(c7.003,-32.203) 9.092,-32.203 9.092,-28.24 ccw(c7.118,-28.24) 8.514,-26.844 5.12,-23.45 cw(c6.733,-21.838) 4.452,-21.838 4.452,-11.866 cw(c6.186,-11.866) 4.96,-10.64 5.864,-9.736 cw(c6.679,-10.551) v1(6.679,-9.398) 9.027,-9.398 cw(c9.027,-10.907) 10.094,-9.84 ccw(c10.867,-9.067) 10.867,-10.16 11.36,-10.16 cw(c11.36,-12.475) 12.997,-10.838 P1.32
  Bottom Layer w0.254: U2.18@6.576,-35.12 v1(6.606,-35.091) ; U1.18 v1(6.679,-9.398)
VCC: C1.2 C2.2 C3.2 C4.2 C5.2 C6.2 C7.2 C8.2 C9.2 C10.2 C11.2 C12.2 P1.29 U1.1 U1.3 U1.9 U1.14 U1.27 U1.37 U1.43 U1.49 U2.1 U2.3 U2.9 U2.14 U2.27 U2.37 U2.43 U2.49 U3.5 | length 38.8
  Bottom Layer w0.508: U3.5@1.76,-7.74 v1(1.76,-6.96) ; C10.2 4.03,-47.091 5.28,-47.091 ; C9.2 4.056,-42.291 4.187,-42.16 4.347,-42.32 4.376,-42.291 v1(6.606,-42.291) ; C8.2 4.023,-38.32 4.052,-38.291 v1(6.606,-38.291) U2.14@6.576,-38.32 ; C7.2 4.106,-27.891 5.356,-27.891 ; C4.2 4.032,-21.36 5.12,-21.36 ; C3.2 4.07,-16.56 v1(6.642,-16.56) U1.9 ; C2.2 4.006,-12.586 v1(6.668,-12.586) ; C1.2 v1(5.28,-2.186) U1.27 ; v1(5.12,-28.72) 5.12,-28.126 5.356,-27.891 ; v1(6.606,-48.69) 5.76,-48.69 5.28,-48.21 5.28,-47.091 ; U2.3 5.28,-47.091 ; U2.27 5.356,-27.891 ; U1.1 5.452,-22.986 5.12,-22.654 5.12,-21.36 ; U1.3 6.642,-21.36 v1(6.4,-21.36) 5.12,-21.36 ; v1(17.906,-44.691) 20.61,-44.691 C12.2@20.64,-44.72 ; U2.37 v1(17.935,-35.12) ; U2.43@17.935,-39.92 v1(17.906,-39.891) 20.002,-39.891 20.032,-39.92 C11.2@20.074,-39.878 ; v1(17.968,-18.986) 20.021,-18.986 20.047,-18.96 C6.2@20.074,-18.987 ; v1(17.968,-14.186) 19.984,-14.186 20.01,-14.16 C5.2@20.074,-14.224
  other v1: 17.968,-9.386
WE: P1.27 U1.16 U2.16 | length 37.2
  Signal Layer 1 w0.254: 5.746,-11.454 ccw(c6.874,-12.58) 5.28,-12.58 5.28,-21.68 ccw(c7.113,-21.68) 5.817,-22.976 9.176,-26.335 cw(c7.38,-28.132) 9.92,-28.132 9.92,-32.788 cw(c7.38,-32.788) 9.176,-34.584 7.398,-36.362 cw(c6.606,-35.57) v1(6.606,-36.691) ; 5.747,-11.453 5.893,-11.307 ; 5.894,-11.306 cw(c6.668,-12.081) v1(6.668,-10.986) cw(c6.668,-13.133) 8.185,-11.614 ; 8.186,-11.615 8.553,-11.982 ; 8.553,-11.982 cw(c6.818,-13.716) 9.271,-13.716 ccw(c11.724,-13.716) 9.989,-15.45 ; 9.989,-15.45 P1.27
pads on no net: P1.11 U1.40 U2.40 U3.1

## Polygon pours and split planes (outlines as drawn)
GND on Bottom Layer "ground" (solid, remove dead copper, pour order 24): 0,0 23.2,0 23.2,-50.8 0,-50.8
GND on Signal Layer 1 "ground" (solid, remove dead copper, pour order 35): 0,0 23.2,0 23.2,-50.8 0,-50.8
GND on Top Layer "ground" (solid, remove dead copper, pour order 36): 0,0 23.2,0 23.2,-50.8 0,-50.8
VCC on Signal Layer 2 "power" (solid, remove dead copper, pour order 33): 21.59,-50.8 ccw(c20.32,-50.8) 20.32,-49.53 ccw(c20.32,-50.8) 19.05,-50.8 17.145,-50.8 0,-50.8 0,0 9.271,0 17.145,0 19.05,0 ccw(c20.32,0) 20.32,-1.27 ccw(c20.32,0) 21.59,0 23.2,0 23.2,-50.8

## Keep-outs
Keep-Out Layer:
  the board outline again, w0.1

## Silkscreen, mask and mechanical layers (free items; w line width, h text height)
Top Overlay:
  text "THIS SIDE FACES OUTWARD" at 19.52,-6.32 h3 r270
  text "JLCJLCJLCJLC" at 1.524,-20.765 h1.52 r270
Bottom Overlay:
  text "SDRAM XS-D v2.5 / (C)2019 Alexey Melnikov" at 19.52,-36.24 h1.52 r270